# Altium PCB SJA1105Q_LAN8870_EVB_revA.PcbDoc (part 2 of 5)
Units mm, origin at the board's own origin, x right, y up, seen from the top; angles counter-clockwise.
Board outline 128 x 110 mm, 6 copper layers (Top Layer, Mid Layer 1, Mid Layer 2, Mid Layer 3, Mid Layer 4, Bottom Layer), stack 1.538 mm thick; 490 components, 327 nets, 1659 pads, 519 vias.
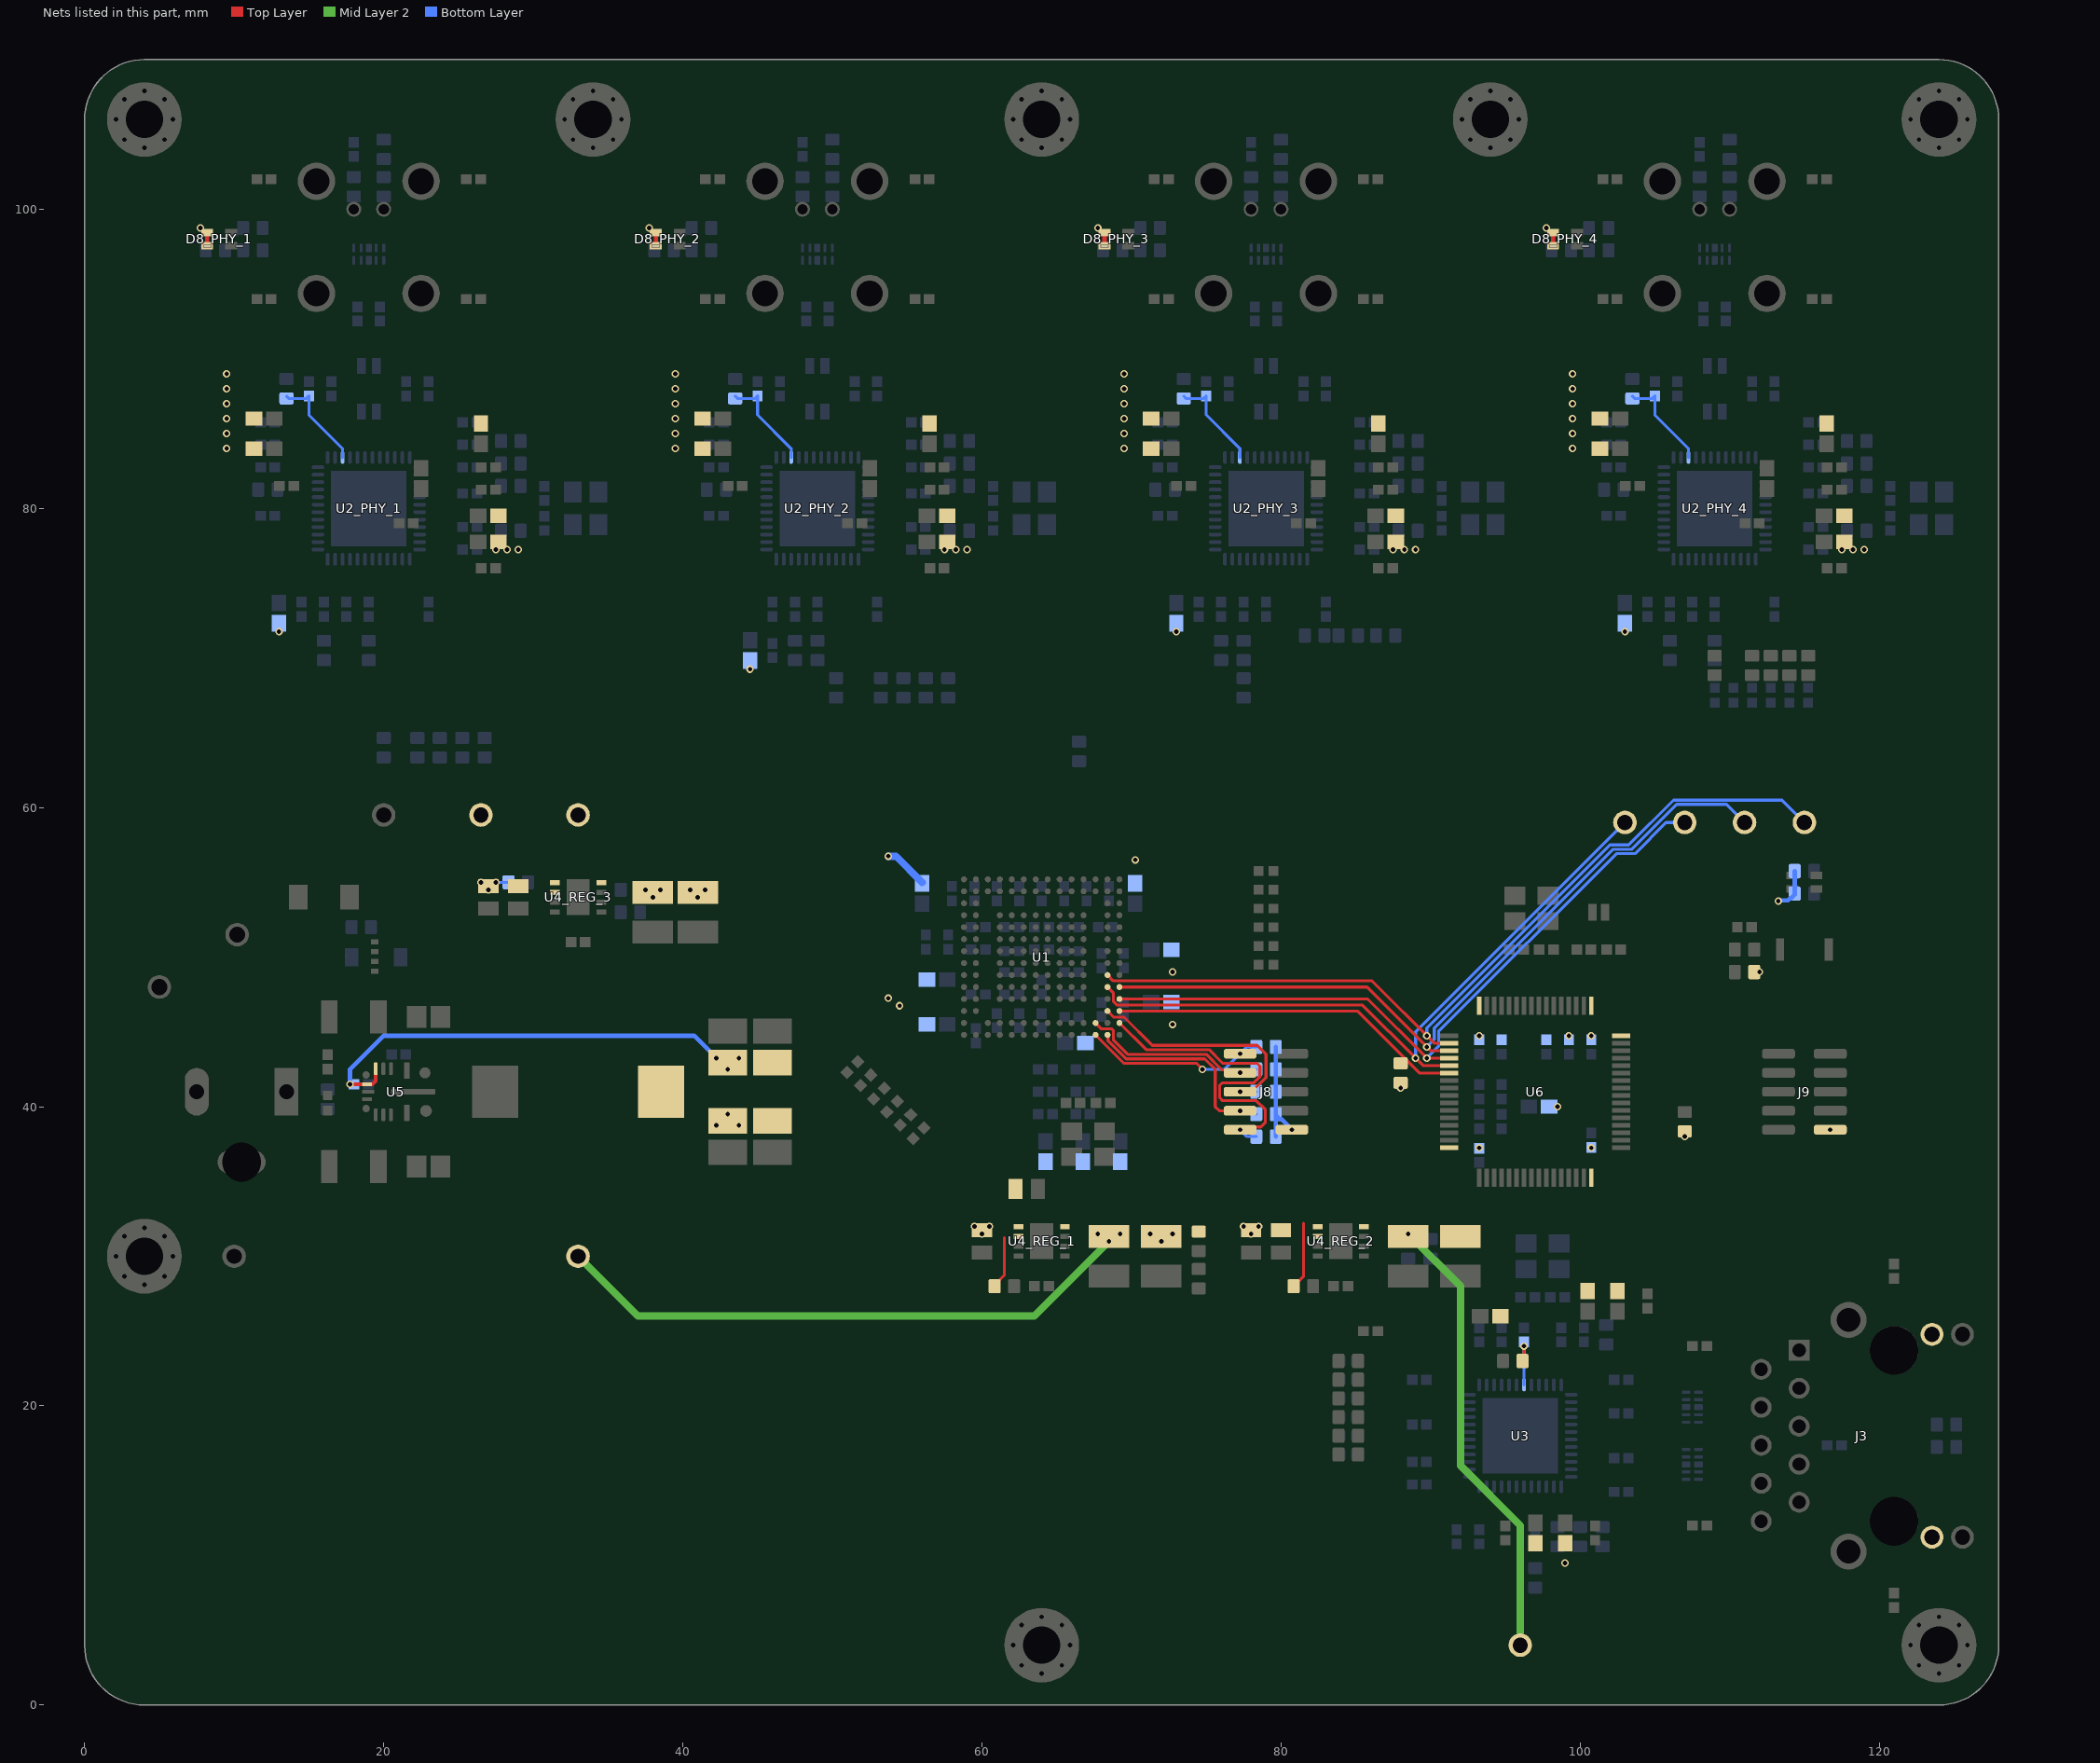
[diagram p6: the nets of this part, all layers, seen from the top]

## Components (designator, comment, footprint, x,y, rotation, side; value= is the part's Value field where it differs from the comment) (continued)
R24_PHY_3 "10k" R0603B 77.5,70.5 r270 bottom value=100k (schematic designator R24)
R24_PHY_4 "10k" R0603B 109,70.5 r270 bottom value=100k (schematic designator R24)
R25_PHY_1 "1k" R0603B 8.75,97.25 r180 bottom value=100k (schematic designator R25)
R25_PHY_2 "1k" R0603B 38.75,97.25 r180 bottom value=100k (schematic designator R25)
R25_PHY_3 "1k" R0603B 68.75,97.25 r180 bottom value=100k (schematic designator R25)
R25_PHY_4 "1k" R0603B 98.75,97.25 r180 bottom value=100k (schematic designator R25)
R26_PHY_1 "1k" R0603B 22.25,64 r90 bottom value=100k (schematic designator R26)
R26_PHY_2 "1k" R0603B 53.25,68 r90 bottom value=100k (schematic designator R26)
R26_PHY_3 "1k" R0603B 66.5,63.75 r90 bottom value=100k (schematic designator R26)
R26_PHY_4 "1k" R0603B 111.5,69.5 r270 top value=100k (schematic designator R26)
R27_PHY_1 "4.7k" R0603B 28.5,83 r0 bottom value=100k (schematic designator R27)
R27_PHY_2 "4.7k" R0603B 58.5,83 r0 bottom value=100k (schematic designator R27)
R27_PHY_3 "4.7k" R0603B 88.5,83 r0 bottom value=100k (schematic designator R27)
R27_PHY_4 "4.7k" R0603B 118.5,83 r0 bottom value=100k (schematic designator R27)
R28_PHY_1 "12.1k" R0603B 28.5,84.5 r0 bottom value=100k (schematic designator R28)
R28_PHY_2 "12.1k" R0603B 58.5,84.5 r0 bottom value=100k (schematic designator R28)
R28_PHY_3 "12.1k" R0603B 88.5,84.5 r0 bottom value=100k (schematic designator R28)
R28_PHY_4 "12.1k" R0603B 118.5,84.5 r0 bottom value=100k (schematic designator R28)
R29_PHY_1 "200" R0603B 16,70.5 r270 bottom value=100k (schematic designator R29)
R29_PHY_2 "200" R0603B 47.5,70.5 r90 bottom value=100k (schematic designator R29)
R29_PHY_3 "200" R0603B 76,70.5 r270 bottom value=100k (schematic designator R29)
R29_PHY_4 "200" R0603B 106,70.5 r270 bottom value=100k (schematic designator R29)
R30 "100k" R0603B 95.5,23 r0 top
R31 "4.7k" R0603B 101.5,11.25 r90 bottom
R32 "4.7k" R0603B 98.5,11.25 r90 bottom
R33 "4.7k" R0603B 84.5,23 r0 top
R34 "1k" R0603B 84.5,20.5 r0 top
R35 "1k" R0603B 84.5,19.25 r0 top
R36 "1k" R0603B 84.5,18 r0 top
R37 "1k" R0603B 84.5,16.75 r0 top
R38 "0402 JUMPER" RESC1005X40X25ML05T05 51.348,42.652 r45 top
R39 "1k" R0603B 97,8.5 r270 bottom
R40 "0402 JUMPER" RESC1005X40X25ML05T05 52.232,41.768 r45 top
R41 "1k" R0603B 100,11.25 r90 bottom
R42 "1k" R0603B 84.5,21.75 r0 top
R43 "6.04k" R0603B 101.75,24.75 r90 bottom
R44_REG_1 "VARIES" R0603B 74.5,31 r90 top (schematic designator R44)
R44_REG_2 "VARIES" R0603B 88.5,30.5 r90 bottom (schematic designator R44)
R44_REG_3 "VARIES" R0603B 36.5,54.5 r0 bottom (schematic designator R44)
R45_REG_1 "100k" R0603B 61.5,28 r0 top (schematic designator R45)
R45_REG_2 "100k" R0603B 81.5,28 r0 top (schematic designator R45)
R45_REG_3 "100k" R0603B 29,55 r0 bottom (schematic designator R45)
R46_REG_1 "100k" R0603B 74.5,28.5 r90 top value=10k (schematic designator R46)
R46_REG_2 "100k" R0603B 90,30.5 r270 bottom value=10k (schematic designator R46)
R46_REG_3 "100k" R0603B 36.5,53 r180 bottom value=10k (schematic designator R46)
R47 "DNP" R0603B 16.25,40.5 r90 bottom
R48 "0402 JUMPER" RESC1005X40X25ML05T05 16.25,40.25 r270 top
R50 "1k" R0603B 115,54.25 r180 bottom
R51 "1k" R0603B 115,55.75 r180 bottom
R52 "10k" R0603B 107,39 r270 top
R53 "330" R0603B 111,50.5 r0 top
R54 "10k" R0603B 111,49 r180 top
R55 "0402 JUMPER" RESC1005X40X25ML05T05 53.116,40.884 r45 top
R56 "0402 JUMPER" RESC1005X40X25ML05T05 54,40 r45 top
R57 "0402 JUMPER" RESC1005X40X25ML05T05 55.768,38.232 r45 top
R58 "0402 JUMPER" RESC1005X40X25ML05T05 54.884,39.116 r45 top
R59 "0402 JUMPER" RESC1005X40X25ML05T05 84.5,20.5 r180 bottom
R60 "0402 JUMPER" RESC1005X40X25ML05T05 84.5,19.25 r180 bottom
R61 "0402 JUMPER" RESC1005X40X25ML05T05 84.5,18 r180 bottom
R62 "0402 JUMPER" RESC1005X40X25ML05T05 84.5,16.75 r180 bottom
R63 "0402 JUMPER" RESC1005X40X25ML05T05 84.5,23 r180 bottom
R64 "0402 JUMPER" RESC1005X40X25ML05T05 84.5,21.75 r180 bottom
R65 "0402 JUMPER" RESC1005X40X25ML05T05 79,49.5 r0 top
R66 "0402 JUMPER" RESC1005X40X25ML05T05 79,50.75 r0 top
R67 "0402 JUMPER" RESC1005X40X25ML05T05 79,52 r0 top
R68 "0402 JUMPER" RESC1005X40X25ML05T05 79,53.25 r0 top
R69 "0402 JUMPER" RESC1005X40X25ML05T05 79,55.75 r0 top
R70 "0402 JUMPER" RESC1005X40X25ML05T05 79,54.5 r0 top
R71 "0402 JUMPER" RESC1005X40X25ML05T05 115.25,67.5 r90 bottom
R72 "0402 JUMPER" RESC1005X40X25ML05T05 114,67.5 r90 bottom
R73 "0402 JUMPER" RESC1005X40X25ML05T05 112.75,67.5 r90 bottom
R74 "0402 JUMPER" RESC1005X40X25ML05T05 111.5,67.5 r90 bottom
R75 "0402 JUMPER" RESC1005X40X25ML05T05 110.25,67.5 r90 bottom
R76 "0402 JUMPER" RESC1005X40X25ML05T05 109,67.5 r90 bottom
SW1 "KXT331LHS" FP-KXT331LHS-MFG 115,50.5 r0 top
U1 "SJA1105QELY" SJA1105QELY-Footprint-1 64,50 r90 top
U2_PHY_1 "LAN8870T-I/PUA" QFN50P700X700X100_HS-49N 19,80 r180 bottom (schematic designator U2)
U2_PHY_2 "LAN8870T-I/PUA" QFN50P700X700X100_HS-49N 49,80 r180 bottom (schematic designator U2)
U2_PHY_3 "LAN8870T-I/PUA" QFN50P700X700X100_HS-49N 79,80 r180 bottom (schematic designator U2)
U2_PHY_4 "LAN8870T-I/PUA" QFN50P700X700X100_HS-49N 109,80 r180 bottom (schematic designator U2)
U3 "LAN8830-V/PSA" QFN50P700X700X100_HS-49N 96,18 r180 bottom
U4_REG_1 "MCP1726T-ADJE/MF" DFN-MF8 64,31 r0 top (schematic designator U4)
U4_REG_2 "MCP1726T-ADJE/MF" DFN-MF8 84,31 r0 top (schematic designator U4)
U4_REG_3 "MCP1726T-ADJE/MF" DFN-MF8 33,54 r0 top (schematic designator U4)
U5 "LM61495Q3RPHRQ1" FP-RPH0016A-MFG 21,41 r270 top
U6 "STM32G473RET6TR" STM32G473RET6TR-Footprint-1 97,41 r270 top
Y1 "ABM8G-25.000MHZ-18-D2Y-T" FP-ABM8G-MFG 67.1,37.5 r180 top
Y2_PHY_1 "ABM8G-25.000MHZ-18-D2Y-T" FP-ABM8G-MFG 33.5,80 r270 bottom (schematic designator Y2)
Y2_PHY_2 "ABM8G-25.000MHZ-18-D2Y-T" FP-ABM8G-MFG 63.5,80 r270 bottom (schematic designator Y2)
Y2_PHY_3 "ABM8G-25.000MHZ-18-D2Y-T" FP-ABM8G-MFG 93.5,80 r270 bottom (schematic designator Y2)
Y2_PHY_4 "ABM8G-25.000MHZ-18-D2Y-T" FP-ABM8G-MFG 123.5,80 r270 bottom (schematic designator Y2)
Y3 "ABM8G-25.000MHZ-18-D2Y-T" FP-ABM8G-MFG 97.5,30 r180 bottom
Y4 "ABM8G-25.000MHZ-18-D2Y-T" FP-ABM8G-MFG 96.75,53.25 r180 top
Y5 "ECS-.327-12.5-1210-TR" FP-ECX-1210-MFG 101.25,53 r180 top

## Footprints (in the part's own frame and the unit in brackets; to place one, negate y for a bottom-side part, rotate by r counter-clockwise, add the part's x,y. Pads: shape width x height; smd on the part's side, far side on the other; paste and mask are expansions set on the pad)
1-2834011-2-Footprint-1 [mil]
  round 62 / inner round 60 / far side round 62 hole 42 paste-99999 mask+0: 1(0,0) 2(137.8,-204.72)
  silkscreen extent -243,-402 206,92, body extent -132,-386 202,86, height 499
3220-10-0300-00-Footprint-1 [mm]
  rrect50% 2.2x0.65 smd: 1(-1.73,2.54) 2(1.73,2.54) 3(-1.73,1.27) 4(1.73,1.27) 5(-1.73,0) 6(1.73,0) 7(-1.73,-1.27) 8(1.73,-1.27) 9(-1.73,-2.54) 10(1.73,-2.54)
  silkscreen extent -2.5,-6.35 2.5,6.35, body extent -2.74,-6.39 2.76,6.31, height 5.22
DFN-MF8 [mm] "SON, 8-Leads, Body 3x3mm, Pitch 0.65mm, Microchip Recommended"
  rect 0.65x0.35 smd: 1(-1.55,0.975) 2(-1.55,0.325) 3(-1.55,-0.325) 4(-1.55,-0.975) 5(1.55,-0.975) 6(1.55,-0.325) 7(1.55,0.325) 8(1.55,0.975)
  rect 1.55x2.4 smd: 9(0,0)
  silkscreen extent -2.47,-1.7 1.7,1.82, body extent -1.55,-1.55 1.55,1.55, height 1
E6S20A-40MT5-Z-Footprint-1 [mm]
  round 1 hole 0.7: 1(-1,0) 2(1,0)
  round 2.5 hole 1.74: 3(-3.5,-5.63) 3(-3.5,1.87) 3(3.5,-5.63) 3(3.5,1.87)
  round 0.025 smd: 3(-3.475,-0.8) 3(0,2.6) 3(3.475,-0.8)
  Top Layer region: -1.1,2.1 1.1,2.1 1.1,3.1 -1.1,3.1
  Top Layer region: -2.3,-1.805 -4.65,-1.805 -4.655,-1.8 -4.655,0.2 -4.647,0.204 -2.99,0.204 -2.985,0.198 -2.992,0.099 -2.995,0 -2.995,0 -2.814,-0.829 -2.305,-1.508 -2.305,-1.508 -2.295,-1.532
  Top Layer region: 2.3,-1.805 4.65,-1.805 4.655,-1.8 4.655,0.2 4.647,0.204 2.99,0.204 2.985,0.198 2.992,0.099 2.995,0 2.995,0 2.814,-0.829 2.305,-1.508 2.305,-1.508 2.295,-1.532
  body extent -5.5,-7.04 5.5,14.86, height 12.8
FP-0402-L_1_0_0_05-W_0_5-IPC_A [mm]
  rect 0.715x0.672 smd paste+0 mask+0: 1(-0.479,0) 2(0.479,0)
  silkscreen extent -0.84,-0.74 0.84,0.74, body extent -0.5,-0.25 0.5,0.25, height 0.55
FP-0805-L_2_01_0_2-W_1_25-IPC_B [mm]
  rect 1.305x1.456 smd paste+0 mask+0: 1(-0.806,0) 2(0.806,0)
  silkscreen extent -1.46,-1.13 1.46,1.13, body extent -1.71,-0.98 1.71,0.98, height 0.25
FP-1210-L_3_2_0_3-W_2_5_0-IPC_B [mm]
  rect 1.553x2.706 smd paste+0 mask+0: 1(-1.325,0) 2(1.325,0)
  silkscreen extent -0.25,-1.35 0.25,1.35, body extent -1.6,-1.25 1.6,1.25, height 2.1
FP-5001-MFG [mm]
  round 1.57 hole 1.016 paste-2539.97 mask+0: 1(0,0)
  silkscreen extent -1.35,-1.34 1.35,1.34, body extent -1.45,-1.45 1.45,1.45, height 0.25
FP-ABM8G-MFG [mm]
  rect 1.4x1.2 smd paste+0 mask+0: 1(-1.1,-0.85) 2(1.1,-0.85) 3(1.1,0.85) 4(-1.1,0.85)
  silkscreen extent -2.48,-1.83 1.6,1.83, body extent -1.9,-1.55 1.9,1.55, height 0.25
FP-ACT1210G-800-2P-TL10-MFG [mm]
  rect 1.05x0.6 smd paste+0 mask+0: 1(-1.525,0.5) 2(-1.525,-0.5) 3(1.525,-0.5) 4(1.525,0.5)
  silkscreen extent -2.72,-1.35 1.7,1.35, body extent -1.95,-1.25 1.95,1.25, height 2.5
FP-BLM18-0_15-t0_8-IPC_B [mm]
  rect 1.106x0.958 smd paste+0 mask+0: 1(-0.676,0) 2(0.676,0)
  silkscreen extent -1.23,-0.88 1.23,0.88, body extent -0.8,-0.4 0.8,0.4, height 0.95
FP-C0805C475J4RACAUTO-MFG [mm]
  rect 0.95x1.35 smd paste+0 mask+0: 1(-0.75,0) 2(0.75,0)
  silkscreen extent -1.15,-1.05 1.15,1.05, body extent -1,-0.63 1,0.63, height 1.4
FP-C3225-250-0_4-MFG [mm]
  rect 1.1x2.2 smd paste+0 mask+0: 1(-1.65,0) 2(1.65,0)
  silkscreen extent -0.72,-1.4 0.72,1.4, body extent -2.3,-1.5 2.3,1.5, height 0.25
FP-DQA0010A-MFG [mm]
  rrect50% 0.565x0.2 smd paste+0 mask+0: 1(-0.417,1) 2(-0.417,0.5) 4(-0.417,-0.5) 5(-0.417,-1) 6(0.417,-1) 7(0.417,-0.5) 9(0.417,0.5) 10(0.417,1)
  rrect25% 0.565x0.4 smd paste-1000 mask+0: 3(-0.417,0) 8(0.417,0)
  silkscreen extent -1.38,-1.48 0.55,1.48, body extent -0.5,-1.25 0.5,1.25, height 0.55
FP-ECX-1210-MFG [mm]
  rect 0.575x1.14 smd paste+0 mask+0: 1(-0.413,0) 2(0.413,0)
  silkscreen extent -0.65,-0.95 0.65,0.95, body extent -0.8,-0.67 0.8,0.67, height 0.25
FP-GRM32E-0_3-0_2-IPC_C [mm]
  rect 1.703x2.606 smd paste+0 mask+0: 1(-1.051,0) 2(1.051,0)
  silkscreen extent -1.9,-1.75 1.9,1.75, body extent -2,-1.45 2,1.45, height 0.25
FP-KXT331LHS-MFG [mm]
  rect 0.55x1.5 smd paste+0 mask+0: 1(-1.625,0) 2(1.625,0)
  silkscreen extent -1.65,-1.15 1.65,1.15, body extent -2,-1.25 2,1.25, height 0.25
FP-PJ-102A-MFG [mm]
  rect 3.2x1.6 hole 1 slot 2.6 at 0 deg paste-2539.97 mask+0: 1(0,-6.5)
  rrect100% 3.2x1.6 hole 1 slot 2.6 at 0 deg paste-2539.97 mask+0: 2(0,-0.5)
  rrect100% 1.6x3.2 hole 2.6 slot 1 at 0 deg paste-2539.97 mask+0: 3(-4.7,-3.5)
  silkscreen extent -4.6,-8.08 4.6,7.3, body extent -5.6,-7.4 4.7,7.4, height 0.25
FP-RPH0016A-MFG [mm]
  round 0.743 smd paste-1000 mask+0: 1(-1.262,1.763)
  rrect25% 1.075x0.4 smd paste+0 mask+0: 2(-1.413,0.55) 14(1.413,0.55)
  rrect40% 0.825x0.25 smd paste+0 mask+0: 3(-1.538,-0.525) 4(-1.538,-1.025) 5(-1.538,-1.525) 11(1.538,-1.525) 12(1.538,-1.025) 13(1.538,-0.525)
  round 0.495 smd paste-1000 mask+0: 6(-1.125,-2.175) 10(1.125,-2.175)
  rrect40% 0.25x0.675 smd paste+0 mask+0: 7(-0.5,-2.113) 9(0.5,-2.113)
  rrect40% 0.25x0.825 smd paste+0 mask+0: 8(0,-2.038)
  round 0.787 smd paste-1000 mask+0: 15(1.281,1.831)
  rrect29% 0.35x2.975 smd paste+0 mask+0: 16(0,0.963)
  Top Layer region: 1.9,1.35 1.925,1.357 1.943,1.375 1.95,1.4 1.95,1.4 1.95,2.05 1.943,2.075 1.925,2.093 1.9,2.1 1.9,2.1 1.65,2.1 1.631,2.104 1.615,2.115 1.604,2.131 1.6,2.15 1.6,2.15 1.6,2.4 1.593,2.425 1.575,2.443 1.55,2.45 1.55,2.45 0.85,2.45 0.825,2.443 0.807,2.425 0.8,2.4 0.8,2.4 0.8,1.4 0.807,1.375 0.825,1.357 0.85,1.35 0.85,1.35 0.85,1.35
  Top Layer region: -1.9,1.35 -1.925,1.357 -1.943,1.375 -1.95,1.4 -1.95,1.4 -1.95,2.05 -1.943,2.075 -1.925,2.093 -1.9,2.1 -1.9,2.1 -1.65,2.1 -1.631,2.104 -1.615,2.115 -1.604,2.131 -1.6,2.15 -1.6,2.15 -1.6,2.4 -1.593,2.425 -1.575,2.443 -1.55,2.45 -1.55,2.45 -0.85,2.45 -0.825,2.443 -0.807,2.425 -0.8,2.4 -0.8,2.4 -0.8,1.4 -0.807,1.375 -0.825,1.357 -0.85,1.35 -0.85,1.35 -0.85,1.35
  Top Layer region: 1.55,-2.45 1.575,-2.443 1.593,-2.425 1.6,-2.4 1.6,-2.4 1.6,-2.15 1.604,-2.131 1.615,-2.115 1.631,-2.104 1.65,-2.1 1.65,-2.1 1.9,-2.1 1.925,-2.093 1.943,-2.075 1.95,-2.05 1.95,-2.05 1.95,-1.95 1.943,-1.925 1.925,-1.907 1.9,-1.9 1.9,-1.9 0.9,-1.9 0.875,-1.907 0.857,-1.925 0.85,-1.95 0.85,-1.95 0.85,-2.4 0.857,-2.425 0.875,-2.443 0.9,-2.45 0.9,-2.45 0.9,-2.45
  Top Layer region: -1.55,-2.45 -1.575,-2.443 -1.593,-2.425 -1.6,-2.4 -1.6,-2.4 -1.6,-2.15 -1.604,-2.131 -1.615,-2.115 -1.631,-2.104 -1.65,-2.1 -1.65,-2.1 -1.9,-2.1 -1.925,-2.093 -1.943,-2.075 -1.95,-2.05 -1.95,-2.05 -1.95,-1.95 -1.943,-1.925 -1.925,-1.907 -1.9,-1.9 -1.9,-1.9 -0.9,-1.9 -0.875,-1.907 -0.857,-1.925 -0.85,-1.95 -0.85,-1.95 -0.85,-2.4 -0.857,-2.425 -0.875,-2.443 -0.9,-2.45 -0.9,-2.45 -0.9,-2.45
  silkscreen extent -2.67,-2.88 1.8,2.88, body extent -2.05,-2.55 2.05,2.55, height 0.25
FP-SF-1206FP-MFG [mm]
  rect 1.25x1.65 smd paste+0 mask+0: 1(-1.725,0) 2(1.725,0)
  silkscreen extent -0.72,-0.82 0.72,0.82, body extent -2.45,-0.92 2.45,0.92, height 0.25
ONSC-SOD-123-2-425-04_V [mm] "SOD, 2-Leads, Body 2.69x1.6mm"
  rect 0.91x1.22 smd: 1(-1.635,0) 2(1.635,0)
  silkscreen extent -1.76,-0.8 0.78,1.28, body extent -1.35,-0.8 1.35,0.8, height 1.35
"PTHV6 M2" [mm]
  round 5 hole 2.5: 1(0,0)
  round 0.5 hole 0.3: 2(0,1.9) 3(1.344,1.344) 4(1.9,0) 5(1.344,-1.344) 6(0,-1.9) 7(-1.9,0) 7(-1.344,-1.344) 7(-1.344,1.344)
QFN50P700X700X100_HS-49N [mm] "QFN, 48-Leads, Body 7.00x7.00mm, Pitch 0.50mm, Thermal Pad 5.05x5.05mm, IPC Medium Density"
  oval 0.85x0.25 smd: 1(-3.4,2.75) 2(-3.4,2.25) 3(-3.4,1.75) 4(-3.4,1.25) 5(-3.4,0.75) 6(-3.4,0.25) 7(-3.4,-0.25) 8(-3.4,-0.75) 9(-3.4,-1.25) 10(-3.4,-1.75) 11(-3.4,-2.25) 12(-3.4,-2.75) 25(3.4,-2.75) 26(3.4,-2.25) 27(3.4,-1.75) 28(3.4,-1.25) 29(3.4,-0.75) 30(3.4,-0.25) 31(3.4,0.25) 32(3.4,0.75) 33(3.4,1.25) 34(3.4,1.75) 35(3.4,2.25) 36(3.4,2.75)
  oval 0.25x0.85 smd: 13(-2.75,-3.4) 14(-2.25,-3.4) 15(-1.75,-3.4) 16(-1.25,-3.4) 17(-0.75,-3.4) 18(-0.25,-3.4) 19(0.25,-3.4) 20(0.75,-3.4) 21(1.25,-3.4) 22(1.75,-3.4) 23(2.25,-3.4) 24(2.75,-3.4) 37(2.75,3.4) 38(2.25,3.4) 39(1.75,3.4) 40(1.25,3.4) 41(0.75,3.4) 42(0.25,3.4) 43(-0.25,3.4) 44(-0.75,3.4) 45(-1.25,3.4) 46(-1.75,3.4) 47(-2.25,3.4) 48(-2.75,3.4)
  rect 5.05x5.05 smd: 49(0,0)
  silkscreen extent -4.43,-3.65 3.65,3.65, body extent -3.5,-3.5 3.5,3.5, height 1
R0603B [mm] "Chip Resistor, 0603, 2-Leads, Body 1.58x0.85mm, IPC Medium Density"
  rrect25% 0.8x0.95 smd: 1(-0.65,0) 2(0.65,0)
  silkscreen extent -0.2,-0.7 0.2,0.7, body extent -0.82,-0.48 0.82,0.48, height 0.5
RESC1005X40X25ML05T05 [mm] "Chip Resistor, 2-Leads, Body 1.00x0.50mm, IPC Low Density"
  rect 0.65x0.65 smd: 1(-0.5,0) 2(0.5,0)
  body extent -0.53,-0.28 0.53,0.28, height 0.4
RJMG201K21120FR-Footprint-1 [mm]
  round 1.53 hole 1.02: L1(-6.785,-4.57) L2(-6.785,-2.54) L3(6.785,-4.57) L4(6.785,-2.54)
  rect 1.398x1.398 / inner round 1.398 / far side rect 1.398x1.398 hole 0.89: P1(5.715,6.35)
  round 1.398 hole 0.89: P2(4.445,8.89) P3(3.175,6.35) P4(1.905,8.89) P5(0.635,6.35) P6(-0.635,8.89) P7(-1.905,6.35) P8(-3.175,8.89) P9(-4.445,6.35) P10(-5.715,8.89)
  round 2.4 hole 1.6: S1(-7.745,3.05) S2(7.745,3.05)
  round 3.25 hole 3.25 unplated: ""(-5.715,0) ""(5.715,0)
  silkscreen extent -7.88,-10.84 8.63,10.81, body extent -8.87,-10.84 8.87,10.81, height 14.8
SISH615ADN-T1-GE3-Footprint-1 [mm]
  rect 0.35x0.5 smd paste+0 mask+0: 1(-0.937,-1.4) 2(-0.288,-1.4) 3(0.363,-1.4) 4(1.012,-1.4)
  round 0.025 smd mask+0: 5-6-7-8(0.038,0.51)
  Top Layer region: -1.187,-0.63 -1.187,-0.215 -1.568,-0.215 -1.568,0.215 -1.187,0.215 -1.187,1.35 -1.137,1.35 -1.137,1.65 -0.737,1.65 -0.737,1.35 -0.487,1.35 -0.487,1.65 -0.088,1.65 -0.088,1.35 0.163,1.35 0.163,1.65 0.563,1.65 0.563,1.35 0.813,1.35 0.813,1.65 1.212,1.65 1.212,1.35 1.262,1.35 1.262,0.215 1.643,0.215 1.643,-0.215 1.262,-0.215 1.262,-0.63
  silkscreen extent -1.51,-2.38 1.59,-1.01, body extent -1.67,-1.75 1.74,1.75, height 0.25
SJA1105QELY-Footprint-1 [mm]
  round 0.4 smd: A1(-5.2,5.2) A2(-4.4,5.2) A3(-3.6,5.2) A4(-2.8,5.2) A5(-2,5.2) A6(-1.2,5.2) A7(-0.4,5.2) A8(0.4,5.2) A9(1.2,5.2) A10(2,5.2) A11(2.8,5.2) A12(3.6,5.2) A13(4.4,5.2) A14(5.2,5.2) B1(-5.2,4.4) B3(-3.6,4.4) B4(-2.8,4.4) B5(-2,4.4) B6(-1.2,4.4) B7(-0.4,4.4) B8(0.4,4.4) B9(1.2,4.4) B10(2,4.4) B11(2.8,4.4) B12(3.6,4.4) B13(4.4,4.4) B14(5.2,4.4) C1(-5.2,3.6) C2(-4.4,3.6) C13(4.4,3.6) C14(5.2,3.6) D1(-5.2,2.8) D2(-4.4,2.8) D4(-2.8,2.8) D5(-2,2.8) D6(-1.2,2.8) D7(-0.4,2.8) D8(0.4,2.8) D9(1.2,2.8) D10(2,2.8) D11(2.8,2.8) D13(4.4,2.8) D14(5.2,2.8) E1(-5.2,2) E2(-4.4,2) E4(-2.8,2) E5(-2,2) E6(-1.2,2) E7(-0.4,2) E8(0.4,2) E9(1.2,2) E10(2,2) E11(2.8,2) E13(4.4,2) E14(5.2,2) F1(-5.2,1.2) F2(-4.4,1.2) F4(-2.8,1.2) F5(-2,1.2) F6(-1.2,1.2) F7(-0.4,1.2) F8(0.4,1.2) F9(1.2,1.2) F10(2,1.2) F11(2.8,1.2) F13(4.4,1.2) F14(5.2,1.2) G1(-5.2,0.4) G2(-4.4,0.4) G4(-2.8,0.4) G5(-2,0.4) G6(-1.2,0.4) G7(-0.4,0.4) G8(0.4,0.4) G9(1.2,0.4) G10(2,0.4) G11(2.8,0.4) G13(4.4,0.4) G14(5.2,0.4) H1(-5.2,-0.4) H2(-4.4,-0.4) H4(-2.8,-0.4) H5(-2,-0.4) H6(-1.2,-0.4) H7(-0.4,-0.4) H8(0.4,-0.4) H9(1.2,-0.4) H10(2,-0.4) H11(2.8,-0.4) H13(4.4,-0.4) H14(5.2,-0.4) J1(-5.2,-1.2) J2(-4.4,-1.2) J4(-2.8,-1.2) J5(-2,-1.2) J6(-1.2,-1.2) J7(-0.4,-1.2) J8(0.4,-1.2) J9(1.2,-1.2) J10(2,-1.2) J11(2.8,-1.2) J13(4.4,-1.2) J14(5.2,-1.2) K1(-5.2,-2) K2(-4.4,-2) K4(-2.8,-2) K5(-2,-2) K6(-1.2,-2) K7(-0.4,-2) K8(0.4,-2) K9(1.2,-2) K10(2,-2) K11(2.8,-2) K13(4.4,-2) K14(5.2,-2) L1(-5.2,-2.8) L2(-4.4,-2.8) L4(-2.8,-2.8) L5(-2,-2.8) L6(-1.2,-2.8) L7(-0.4,-2.8) L8(0.4,-2.8) L9(1.2,-2.8) L10(2,-2.8) L11(2.8,-2.8) L13(4.4,-2.8) L14(5.2,-2.8) M1(-5.2,-3.6) M2(-4.4,-3.6) M13(4.4,-3.6) M14(5.2,-3.6) N1(-5.2,-4.4) N2(-4.4,-4.4) N3(-3.6,-4.4) N4(-2.8,-4.4) N5(-2,-4.4) N6(-1.2,-4.4) N7(-0.4,-4.4) N8(0.4,-4.4) N9(1.2,-4.4) N10(2,-4.4) N11(2.8,-4.4) N12(3.6,-4.4) N13(4.4,-4.4) N14(5.2,-4.4) P1(-5.2,-5.2) P2(-4.4,-5.2) P3(-3.6,-5.2) P4(-2.8,-5.2) P5(-2,-5.2) P6(-1.2,-5.2) P7(-0.4,-5.2) P8(0.4,-5.2) P9(1.2,-5.2) P10(2,-5.2) P11(2.8,-5.2) P12(3.6,-5.2) P13(4.4,-5.2) P14(5.2,-5.2)
  silkscreen extent -6.1,-6 6,6.1, body extent -6,-6 6,6, height 1.5
STM32G473RET6TR-Footprint-1 [mm]
  rect 1.194x0.305 smd paste+0 mask+0: 1(-5.75,3.75) 2(-5.75,3.25) 3(-5.75,2.75) 4(-5.75,2.25) 5(-5.75,1.75) 6(-5.75,1.25) 7(-5.75,0.75) 8(-5.75,0.25) 9(-5.75,-0.25) 10(-5.75,-0.75) 11(-5.75,-1.25) 12(-5.75,-1.75) 13(-5.75,-2.25) 14(-5.75,-2.75) 15(-5.75,-3.25) 16(-5.75,-3.75) 33(5.75,-3.75) 34(5.75,-3.25) 35(5.75,-2.75) 36(5.75,-2.25) 37(5.75,-1.75) 38(5.75,-1.25) 39(5.75,-0.75) 40(5.75,-0.25) 41(5.75,0.25) 42(5.75,0.75) 43(5.75,1.25) 44(5.75,1.75) 45(5.75,2.25) 46(5.75,2.75) 47(5.75,3.25) 48(5.75,3.75)
  rect 0.305x1.194 smd paste+0 mask+0: 17(-3.75,-5.75) 18(-3.25,-5.75) 19(-2.75,-5.75) 20(-2.25,-5.75) 21(-1.75,-5.75) 22(-1.25,-5.75) 23(-0.75,-5.75) 24(-0.25,-5.75) 25(0.25,-5.75) 26(0.75,-5.75) 27(1.25,-5.75) 28(1.75,-5.75) 29(2.25,-5.75) 30(2.75,-5.75) 31(3.25,-5.75) 32(3.75,-5.75) 49(3.75,5.75) 50(3.25,5.75) 51(2.75,5.75) 52(2.25,5.75) 53(1.75,5.75) 54(1.25,5.75) 55(0.75,5.75) 56(0.25,5.75) 57(-0.25,5.75) 58(-0.75,5.75) 59(-1.25,5.75) 60(-1.75,5.75) 61(-2.25,5.75) 62(-2.75,5.75) 63(-3.25,5.75) 64(-3.75,5.75)
  silkscreen extent -6.93,-6.85 6.85,6.85, body extent -6,-6 6,6, height 1.6
WE-LHMI_1335 [mm] "SMT Power Inductor, 2-Leads, body 12.6x12.6mm"
  rect 3.1x3.5 smd: 1(-5.55,0) 2(5.55,0)
  Top Layer keep-out region: -3.9,6.45 3.9,6.45 3.9,-6.45 -3.9,-6.45
  silkscreen extent -7.72,-6.45 6.45,6.45, body extent -6.75,-6.3 6.75,6.3, height 3.3
WL-SBCD_0606 [mm] "SMT Bi-color Chip LED Diffuesed, body 1.5x1.6mm"
  rect 0.5x0.8 smd: 1(-0.45,0.8) 2(-0.45,-0.8) 3(0.45,-0.8) 4(0.45,0.8)
  silkscreen extent -0.07,1.48 0.07,1.63, body extent -0.75,-0.8 0.75,0.8, height 0.55

## Part data
C1 C2 C3 C4 C5 C6 C7 C8 C9 C10 C11 C12 C13 C14 C15 C16 C17 C18 C19 C20 C21 C22 C23 C24 C25 C26 C27 C28 C29 C30 C31 C32 C33 C34 C35 C36 C37 C38 C39 C40 C41 C42 C43 C44 C45 C46 C47 C48 C49 C50 C51 C52 C53 C54 C55 C56 C57 C58 C59 C60 C61 C62 C63 C64_PHY_1 C64_PHY_2 C64_PHY_3 C64_PHY_4 C65_PHY_1 C65_PHY_2 C65_PHY_3 C65_PHY_4 C66_PHY_1 C66_PHY_2 C66_PHY_3 C66_PHY_4 C67_PHY_1 C67_PHY_2 C67_PHY_3 C67_PHY_4 C68_PHY_1 C68_PHY_2 C68_PHY_3 C68_PHY_4 C69_PHY_1 C69_PHY_2 C69_PHY_3 C69_PHY_4 C70_PHY_1 C70_PHY_2 C70_PHY_3 C70_PHY_4 C71_PHY_1 C71_PHY_2 C71_PHY_3 C71_PHY_4 C72_PHY_1 C72_PHY_2 C72_PHY_3 C72_PHY_4 C73_PHY_1 C73_PHY_2 C73_PHY_3 C73_PHY_4 C74_PHY_1 C74_PHY_2 C74_PHY_3 C74_PHY_4 C75_PHY_1 C75_PHY_2 C75_PHY_3 C75_PHY_4 C76_PHY_1 C76_PHY_2 C76_PHY_3 C76_PHY_4 C77_PHY_1 C77_PHY_2 C77_PHY_3 C77_PHY_4 C78_PHY_1 C78_PHY_2 C78_PHY_3 C78_PHY_4 C79_PHY_1 C79_PHY_2 C79_PHY_3 C79_PHY_4 C80_PHY_1 C80_PHY_2 C80_PHY_3 C80_PHY_4 C81_PHY_1 C81_PHY_2 C81_PHY_3 C81_PHY_4 C82_PHY_1 C82_PHY_2 C82_PHY_3 C82_PHY_4 C83_PHY_1 C83_PHY_2 C83_PHY_3 C83_PHY_4 C84_PHY_1 C84_PHY_2 C84_PHY_3 C84_PHY_4 C85_PHY_1 C85_PHY_2 C85_PHY_3 C85_PHY_4 C86_PHY_1 C86_PHY_2 C86_PHY_3 C86_PHY_4 C87_PHY_1 C87_PHY_2 C87_PHY_3 C87_PHY_4 C88_PHY_1 C88_PHY_2 C88_PHY_3 C88_PHY_4 C89_PHY_1 C89_PHY_2 C89_PHY_3 C89_PHY_4 C90_PHY_1 C90_PHY_2 C90_PHY_3 C90_PHY_4 C91_PHY_1 C91_PHY_2 C91_PHY_3 C91_PHY_4 C92_PHY_1 C92_PHY_2 C92_PHY_3 C92_PHY_4 C93 C94 C95 C96 C97 C98 C99 C100 C101 C102 C103 C104 C105 C106 C107 C108 C109 C110 C111 C112 C113 C114 C119_REG_1 C119_REG_2 C119_REG_3 C120 C129 C130 C131 C132 C133 C134 C135 C136 C137 C138 C139 C140 C141 C142 C143 C144 C145 C146: library part CMP-001-00058-1, "LARGE PADS, 0402 CAP, CHANGE COMMENT TO MATCH REAL P/N", Capacitor Type=Ceramic, Case/Package=0402, Max Operating Temperature=85°C, Min Operating Temperature=-55°C, Mounting Technology="Surface Mount", Pins=2, RoHS Compliant=Yes
C115_REG_1 C115_REG_2 C115_REG_3 C116_REG_1 C116_REG_2 C116_REG_3: library part CMP-00212-84766729-1, "C0805C475J4RACAUTO Cap Ceramic 4.7uF 16V X7R 5% Pad SMD 0805 125C Automotive T/R", Capacitance=4.7µF, Case/Package=0805, Dielectric=X7R, Dielectric Material=Ceramic, Max Operating Temperature=125°C, Min Operating Temperature=-55°C, Tolerance=5%, Voltage Rating=16V, Height=1.4mm, Material=Ceramic, NexarPartId=84766729, Packaging="Cut Tape", RoHS=Compliant, Voltage Rating (DC)=16V
C117_REG_1 C117_REG_2 C117_REG_3 C118_REG_1 C118_REG_2 C118_REG_3: library part CMP-14477-002774-2, "None", Capacitance=1uF, Case Code (Imperial)=1210, Case Code (Metric)=3225, Dielectric=X5R, Max Operating Temperature=125°C, Min Operating Temperature=-55°C, Package Quantity=1, Resistor Type=Ceramic, Tolerance=10%, Voltage=100V, Case/Package=1210, Construction=Flat, Depth=2.5mm, Halogen Free="Halogen Free", Height=1.9mm, Length=3.2mm, Mount="Surface Mount", Number of Pins=2, Packaging="Tape and Reel", Radiation Hardening=No, REACH SVHC="No SVHC", RoHS Compliant=Yes, Series=M, Termination=SMD/SMT, Thickness=0.083inch, Voltage Rating=100V, Voltage Rating (DC)=100V, Width=2.5mm
C121 C122 C123 C124: library part CMP-2000-06362-2, "CAP CER 47UF 16V X5R 1210", Capacitance=47uF, Case Code (Imperial)=1210, Case Code (Metric)=3225, Dielectric=X5R, Max Operating Temperature=85°C, Min Operating Temperature=-55°C, Package Quantity=1, Tolerance=10%, Voltage=16V, Case/Package=1210, Depth=2.5mm, Height=2.5mm, Lead Free="Lead Free", Length=3.2mm, Material=Ceramic, Mount="Surface Mount", Number of Pins=2, Packaging="Cut Tape", Radiation Hardening=No, REACH SVHC="No SVHC", RoHS Compliant=Yes, Termination=SMD/SMT, Thickness=0.106inch, Voltage Rating=16V, Voltage Rating (DC)=16V, Width=0.098inch
C125 C126: library part CMP-08246-002653-1, "Multilayer Ceramic Capacitors 10uF ±20% 50V X7R SMD 1210", Capacitance=10uF, Case Code (Imperial)=1210, Case Code (Metric)=3225, Dielectric=X7R, Dielectric Material=Ceramic, Max Operating Temperature=125°C, Min Operating Temperature=-55°C, Package Quantity=1000, Tolerance=20%, Voltage Rating=50V, Case/Package=1210, Height=2.5mm, Lead Free="Lead Free", Length=0.126inch, Mount="Surface Mount", Packaging="Tape and Reel", REACH SVHC="No SVHC", Series=C, Termination=SMD/SMT, Thickness=0.11inch, Voltage Rating (DC)=50V, Weight=0.000564oz, Width=0.098inch
C127 C128: library part CMP-04427-003155-1, "Automotive Ceramic Capacitor, 0805, 470nF, 5%, X7R, 15%, 50V", Capacitance=470nF, Case/Package=0805, Dielectric=X7R, Max Operating Temperature=125°C, Min Operating Temperature=-55°C, Package Quantity=2000, Tolerance=5%, Voltage Rating (DC)=50V, Construction=Flat, Depth=1.25mm, Length=2.01mm, Mount="Surface Mount", Packaging="Tape and Reel", Radiation Hardening=No, RoHS Compliant=Yes
D1: library part CMP-1060-00565-1, "Zener Voltage Regulator, 500 mW, 2-Pin SOD-123, Pb-Free, Tape and Reel", Manufacturer="On Semiconductor", ComponentLink1Description="Manufacturer URL", ComponentLink1URL=http://www.onsemi.com/, ComponentLink2Description=Datasheet, ComponentLink2URL=http://www.onsemi.com/pub_link/Collateral/MMSZ5221BT1-D.PDF, ComponentLink3Description="Package Specification", ComponentLink3URL=http://www.onsemi.com/pub_link/Collateral/425-04.PDF, DatasheetVersion="Rev. 12", Mounting Technology="Surface Mount", P Max (W)=0.5, PackageDescription="2-Pin SOD, Body 1.6 x 2.69 mm", PackageReference=SOD-123-2-425-04, PackageVersion="Rev. G, 10/2009", Packing="Tape and Reel", PartNumber=MMSZ5242BT1G, RoHS=Pb-Free, VZ Typ (V)=12
D2 D3 D4 D5 D6 D7: library part CMP-04989-000002-1, "4-CHANNEL LOW-CAPACITANCE SURGE", Ambient Temperature Range High=+125°C, Ambient Temperature Range Low=-40°C, Breakdown Voltage=5.5V, Capacitance=0.55pF, Clamping Voltage=11.5V, Manufacturer="Texas Instruments", Manufacturer Part Number=ESD204DQAR, Package=DQA0010A, Peak Pulse Current=5.5A, Peak Pulse Power=50W, Reverse Standoff Voltage=3.6V, Temperature="-40°C to +125°C", Automotive=No, Category=Diode, ComponentLink2Description=Datasheet, ComponentLink2URL=http://www.ti.com/lit/ds/symlink/esd204.pdf, Device Class L1="Circuit Protection", Device Class L2="TVS Diodes", Device Class L3=unset, Digikey Description="4-CHANNEL LOW-CAPACITANCE SURGE", Direction=Bidirectional, Height=0.55mm, Lead Free=Yes, Mouser Description="4-Channel Low-Capacitance Surge and ESD Protection Diode 10-USON -40 to 125", Number Of Channels=4, Octopart=https://octopart.com/esd204dqar-texas+instruments-89917476, RoHS=TRUE, Standoff Height=0mm, Temperature Range High=+125°C, Temperature Range Low=-40°C
D8_PHY_1 D8_PHY_2 D8_PHY_3 D8_PHY_4 D10: library part CMP-004-00040-2, "Led, Red/Grn, 180Mcd/230Mcd, 624Nm/525Nm Rohs Compliant: Yes", Component Type=Standard, Design Item ID=CMP-004-00034-2, Pins=4, Source=rgled.SchLib
F1: library part CMP-07399-000013-1, "FUSE BOARD MOUNT 2A 63VDC 1206", Case Code (Imperial)=1206, Case Code (Metric)=3216, Max Operating Temperature=105°C, Min Operating Temperature=-20°C, Voltage Rating (DC)=63V, Approvals=UL, Case/Package=1206, Current Rating=2A, Fuse Type="Board Mount (Cartridge Style Excluded)", Mount="Surface Mount", Packaging="Cut Tape", RoHS Compliant=Yes, Series="SinglFuse™ SF-1206FP"
FB1 FB2 FB3 FB4 FB5 FB6 FB7 FB8 FB9 FB10 FB11_PHY_1 FB11_PHY_2 FB11_PHY_3 FB11_PHY_4 FB12_PHY_1 FB12_PHY_2 FB12_PHY_3 FB12_PHY_4 FB13_PHY_1 FB13_PHY_2 FB13_PHY_3 FB13_PHY_4 FB14_PHY_1 FB14_PHY_2 FB14_PHY_3 FB14_PHY_4 FB15_PHY_1 FB15_PHY_2 FB15_PHY_3 FB15_PHY_4 FB16_PHY_1 FB16_PHY_2 FB16_PHY_3 FB16_PHY_4 FB17_PHY_1 FB17_PHY_2 FB17_PHY_3 FB17_PHY_4 FB18 FB19 FB20 FB21 FB22 FB23: library part CMP-06046-002069-1, "Chip Ferrite Bead, 0603, 330Ω @ 100MHz, 0.08Ω, 25%, 1.7A", Case Code (Imperial)=0603, Case Code (Metric)=1608, DC Resistance (DCR)=80mR, Max Current Rating=1.7A, Max Operating Temperature=125°C, Min Operating Temperature=-55°C, Package Quantity=4000, Ratings=AEC-Q200, Case/Package=0603, Height=0.037inch, Length=0.063inch, Mount="Surface Mount", Number of Lines=1, Packaging="Tape and Reel", RoHS Compliant=Yes, Width=0.032inch
J1: library part CMP-002-00067-1, "Barrier Strip Terminal Block", RoHS Compliant=Yes
J2: library part CMP-12637-106234071-1, "PJ-102A 2.0 x 6.5 mm, 2.5 A, Horizontal, Through Hole, Tapered Pins, Dc Power Jack Connector", Color=Black, Current Rating=2.5A, Flammability Rating="UL94 V-0", Insulation Resistance=50MΩ, Max Operating Temperature=85°C, Min Operating Temperature=-25°C, Voltage Rating=24V, Contact Gender=Male, Contact Material="Copper, Nickel, Tin", Contact Plating=Nickel, Diameter=2.1mm, Gender=Male, Height=11.2mm, Housing Color=Black, Housing Material=Thermoplastic, Inside Diameter=2mm, Lead Free="Lead Free", Lifecycle Status=Production, Mount="Through Hole", NexarPartId=106234071, Number of Conductors=2, Number of Contacts=3, Orientation=Horizontal, Outside Diameter=6.5mm, Packaging=Bulk, RoHS=Compliant, Schedule B="8536695050, 8536695050", Shielding=No, Termination="Through Hole", Voltage Rating (DC)=24V
J3: library part CMP-002-00090-1, "Connector RJ45 Receptacle 8 Position Solder Straight Through Hole 1 Port Tray", Max Operating Temperature=70°C, Min Operating Temperature=0°C, Pins=8
J4 J5 J6 J7: library part CMP-002-00103-2, "RF Connector, 2 Contact(s), Male, Panel Mount, Board And Panel Mount, Solder Terminal, Plug", Max Operating Temperature=105°C, Min Operating Temperature=-40°C, Pins=2
J8 J9: library part CMP-001-0013-3, "CONN HEADER SMD 10POS 1.27MM"
J10 J11 J12 J13 J14 J15 J16 J17 J18 J19: library part CMP-2000-05181-2, "PC TEST POINT MINIATURE BLACK", Color=Black, Flammability Rating="UL94 V-0", Package Quantity=100, Body Material=Bronze, Contact Material=Bronze, Contact Plating=Silver, Diameter=2.54mm, Height=0.3inch, Hole Diameter=1.6mm, Housing Color=Black, Inside Diameter=1.27mm, Insulation=Insulated, Insulation Material=Nylon, Lead Free="Lead Free", Length=7.62mm, Material=Nylon, Mount="Through Hole", Number of Contacts=1, Number of Ports=1, Orientation=Straight, Outside Diameter=2.54mm, Packaging=Bulk, Plating=Silver, REACH SVHC="No SVHC", RoHS Compliant=Yes, Series=THM, Termination="Through Hole"
L1_PHY_1 L1_PHY_2 L1_PHY_3 L1_PHY_4: library part CMP-08256-000023-1, "CMC 80UH 70MA 2LN 3.8KOHM SMD"
L2: library part CMP-1353-00019-6, "Inductor Power Shielded/Molded Wirewound 2.2uH 20% 100KHz Powdered Iron 10A 0.008Ohm DCR T/R Automotive AEC-Q200", Ambient Temperature Range High=85°C, Ambient Temperature Range Low=-40°C, Case/Package=Nonstandard, Current Rating=10A, DC Resistance (DCR)=7.2mΩ, Frequency=22MHz, Inductance=2.2µH, Inductance Tolerance=20%, Max Operating Temperature=125°C, Saturation Current=14.2A, Series Resistance=8mΩ, Test Frequency=100kHz, Composition=Wirewound, Core Material="Composite, Ferrite", Depth=12.6mm, Height=3.3mm, Height - Seated (Max)=3.5052mm, Length=13.5mm, Max DC Current=10A, Min Operating Temperature=-40°C, Mount="Surface Mount", REACH SVHC=Unknown, RMS Current (Irms)=10A, RoHS=Compliant, Self Resonant Frequency=22MHz, Shielding=Shielded, Termination=SMD/SMT, Tolerance=20%, Width=12.6mm
MH1 MH2 MH3 MH4 MH5 MH6 MH7 MH8: library part CMP-00028-00001-13, "Plated mounting hole with 6 peripheral vias. This is a generic symbol that groups all relevant footprints."
Q1: library part CMP-013-00018-2, "Trans MOSFET P-CH 20V 22.1A 8-Pin PowerPAK 1212 EP T/R", Component Type=Standard, Design Item ID=CMP-013-00036-4, Pins=5, Source=SISH615ADN-T1-GE3.SchLib
R1 R2 R3 R4 R5 R6 R7 R8 R10 R11_PHY_1 R11_PHY_2 R11_PHY_3 R11_PHY_4 R12_PHY_1 R12_PHY_2 R12_PHY_3 R12_PHY_4 R13_PHY_1 R13_PHY_2 R13_PHY_3 R13_PHY_4 R14_PHY_1 R14_PHY_2 R14_PHY_3 R14_PHY_4 R15_PHY_1 R15_PHY_2 R15_PHY_3 R15_PHY_4 R16_PHY_1 R16_PHY_2 R16_PHY_3 R16_PHY_4 R17_PHY_1 R17_PHY_2 R17_PHY_3 R17_PHY_4 R18_PHY_1 R18_PHY_2 R18_PHY_3 R18_PHY_4 R19_PHY_1 R19_PHY_2 R19_PHY_3 R19_PHY_4 R20_PHY_1 R20_PHY_2 R20_PHY_3 R20_PHY_4 R21_PHY_1 R21_PHY_2 R21_PHY_3 R21_PHY_4 R22_PHY_1 R22_PHY_2 R22_PHY_3 R22_PHY_4 R23_PHY_1 R23_PHY_2 R23_PHY_3 R23_PHY_4 R24_PHY_1 R24_PHY_2 R24_PHY_3 R24_PHY_4 R25_PHY_1 R25_PHY_2 R25_PHY_3 R25_PHY_4 R26_PHY_1 R26_PHY_2 R26_PHY_3 R26_PHY_4 R27_PHY_1 R27_PHY_2 R27_PHY_3 R27_PHY_4 R28_PHY_1 R28_PHY_2 R28_PHY_3 R28_PHY_4 R29_PHY_1 R29_PHY_2 R29_PHY_3 R29_PHY_4 R30 R31 R32 R33 R34 R35 R36 R37 R39 R41 R42 R43 R44_REG_1 R44_REG_2 R44_REG_3 R45_REG_1 R45_REG_2 R45_REG_3 R46_REG_1 R46_REG_2 R46_REG_3 R47 R50 R51 R52 R53 R54: library part CMP-009-00002-14, "Resistor"
R38 R40 R48 R55 R56 R57 R58 R59 R60 R61 R62 R63 R64 R65 R66 R67 R68 R69 R70 R71 R72 R73 R74 R75 R76: library part CMP-009-00118-2, "READ THE NAME", Component Type=Standard, Design Item ID=CMP-009-00206-2, Pins=2, Source=0402jump.SchLib
SW1: library part CMP-10040-000029-1, "SWITCH TACTILE SPST-NO 0.02A 15V", Current Rating=5A, Flammability Rating="UL94 V-0", Insulation Color=Black, Max Operating Temperature=85°C, Min Operating Temperature=-40°C, Operating Force=240gf, Actuator Type=Standard, Connector Type=USB, Contact Plating=Gold, Gender=Receptacle, Illumination Type=Non-Illuminated, Mechanical Life=500000Cycles, Mount="Surface Mount", Number of Contacts=24, Number of Ports=1, Packaging="Tape and Reel", Switch Function=Off-Mom, Switch Travel=0.13mm, Termination=Solder, Throw Configuration=SPST
U1: library part CMP-015-00025-2, "Ethernet Controller, Ethernet Switch, IEEE 802.3, 1.2 V, LFBGA, 159 Pins", Max Operating Temperature=105°C, Min Operating Temperature=-40°C
U2_PHY_1 U2_PHY_2 U2_PHY_3 U2_PHY_4: library part CMP-015-00023-5, "100/1000BASE-T1 Rgmii/sgmii Phy", Case/Package=VQFN, Pins=48
U3: library part CMP-015-00022-5, "LAN8830 Series RGMII Interface Gigabit Ethernet Transceiver - VQFN-48", Case/Package=VQFN, Pins=48
U4_REG_1 U4_REG_2 U4_REG_3: library part CMP-0136-00358-1, "1A, Low Voltage, Low Quiescent Current LDO Regulator, 8-Pin DFN, Extended Temperature, Tape and Reel", DatasheetVersion="revC, Aug-2007", PackageDescription="8-Lead Plastic Dual Flat, No Lead Package (MF) - 3x3x0.9mm Body [DFN]", PackageReference=DFN-MF8, PackageVersion="revBB, Aug-2009"
U5: library part CMP-04918-000675-1, "10-A AUTOMOTIVE BUCK CONVERTER O"
U6: library part CMP-020-00020-2, "MCU 32-Bit STM32 ARM Cortex-M4 RISC 512KB Flash 1.71V to 3.6V 64-Pin LQFP T/R", RoHS Compliant=Yes
Y1 Y2_PHY_1 Y2_PHY_2 Y2_PHY_3 Y2_PHY_4 Y3 Y4: library part CMP-2000-05733-3, "Crystal 25MHz ±20ppm (Tol) ±30ppm (Stability) 18pF FUND 60Ω 4-Pin SMD T/R", Case/Package=CSMD, ESR (Equivalent Series Resistance)=60R, Frequency=25MHz, Frequency Stability=30ppm, Frequency Tolerance=20ppm, Load Capacitance=18pF, Max Operating Temperature=85°C, Min Operating Temperature=-40°C, Operating Frequency="25 MHz", Package Quantity=1000, Depth=2.5mm, Height=0.039inch, Lead Free="Lead Free", Length=3.2mm, Mount="Surface Mount", Number of Pins=4, Packaging="Tape and Reel", Radiation Hardening=No, Series=ABM8G, Series Resistance=60R, Termination=SMD/SMT, Tolerance=20ppm, Width=0.098inch
Y5: library part CMP-40224-000006-1, "CRYSTAL 32.7680KHZ 12.5PF SMD", Frequency=32.768kHz, Load Capacitance=12.5pF, Manufacturer="ECS International", Package=ECX-1210, Temperature="-40°C to +85°C", Temperature Range High=+85°C, Temperature Range Low=-40°C, Tolerance=20ppm, Automotive=No, Category=Crys, ComponentLink2Description=Datasheet, ComponentLink2URL=https://ecsxtal.com/store/pdf/ECX-1210.pdf, Device Class L1="Passive Components", Device Class L2="Crystals / Oscillators", Device Class L3=Crystals, Digikey Description="CRYSTAL 32.7680KHZ 12.5PF SMD", Esr=90kΩ, Height=0.5mm, Lead Free=Yes, Manufacturer Part Number=ECS-.327-12.5-1210-TR, Octopart=https://octopart.com/ecs-.327-12.5-1210-tr-ecs+international-81221340, RoHS=TRUE, Series=ECX-1210

## Via types
v1: diameter 0.5, hole 0.3, Top Layer to Bottom Layer, tented both sides, 469 vias
v2: diameter 0.4, hole 0.3, Top Layer to Bottom Layer, tented both sides, 44 vias
v3: diameter 0.66, hole 0.33, Top Layer to Bottom Layer, tented both sides, 6 vias

## Nets (pads, with @x,y where several pads share a name; then routed paths per layer and width w, separated by ;. In a path a pad name is that pad's centre, name@x,y a point inside that pad or via, vN(x,y) a via of type N, cw(c..) or ccw(c..) an arc to the next point about the centre after c; other vN are vias at no path point)
1V2: C117_REG_1.1 C118_REG_1.1 FB1.1 FB4.1 FB7.1 J14.1 R44_REG_1.2 U4_REG_1.8 | length 39.2
  Mid Layer 2 w0.5: J14.1@33,30 37,26 63.5,26 v1(68.5,31)
  other v1: 72,31 67.75,31.5 69.25,31.5 71.25,31.5 72.75,31.5
3V3: C115_REG_1.1 C115_REG_2.1 C115_REG_3.1 C116_REG_1.1 C116_REG_2.1 C116_REG_3.1 C121.1 C122.1 C123.1 C124.1 C129.2 C136.1 C137.1 C138.1 C139.1 C140.1 C143.1 C144.1 D8_PHY_1.2 D8_PHY_1.3 D8_PHY_2.2 D8_PHY_2.3 D8_PHY_3.2 D8_PHY_3.3 D8_PHY_4.2 D8_PHY_4.3 FB2.1 FB3.1 FB5.1 FB6.1 FB8.1 FB9.1 FB10.1 FB15_PHY_1.1 FB15_PHY_2.1 FB15_PHY_3.1 FB15_PHY_4.1 FB16_PHY_1.1 FB16_PHY_2.1 FB16_PHY_3.1 FB16_PHY_4.1 FB17_PHY_1.1 FB17_PHY_2.1 FB17_PHY_3.1 FB17_PHY_4.1 FB18.1 FB21.1 FB23.1 J3.L2 J3.L4 J8.1 J9.1 J12.1 L2.2 R4.1 R5.1 R6.1 R7.2 R8.1 R10.2 R45_REG_1.1 R45_REG_2.1 R45_REG_3.1 R50.2 R51.2 R52.2 R54.1 U4_REG_1.1 U4_REG_1.2 U4_REG_2.1 U4_REG_2.2 U4_REG_3.1 U4_REG_3.2 U5.5 U5.7 U6.1 U6.16 U6.32 U6.48 U6.64 | length 55.5
  Top Layer w0.2: R45_REG_1.1@60.85,28 60.85,28.075 61.5,28.725 61.5,31.25 ; R45_REG_2.1@80.85,28 81.5,28.65 81.5,32.191
  Top Layer w0.25: v1(17.75,41.5) 19.25,41.5 19.475,41.725 U5.5@19.475,42.538
  Top Layer w0.3: D8_PHY_1.3@8.2,97.55 D8_PHY_1.2@8.2,98.45 ; D8_PHY_2.3@38.2,97.55 D8_PHY_2.2@38.2,98.45 ; D8_PHY_3.3@68.2,97.55 D8_PHY_3.2@68.2,98.45 ; D8_PHY_4.3@98.2,97.55 D8_PHY_4.2@98.2,98.45
  Bottom Layer w0.2: v1(27.5,55) R45_REG_3.1@28.35,55
  Bottom Layer w0.3: v1(17.75,41.5) 17.75,42.5 20,44.75 40.75,44.75 v1(42.25,43.25) ; R4.1@79.65,38 R5.1@79.65,39.5 ; R8.1@79.65,44 R6.1@79.65,41 R5.1@79.65,39.5 ; v1(80.73,38.46) 80.015,39.175 79.9,39.175 79.65,39.425 R5.1@79.65,39.5 ; v1(113.25,53.75) 113.288,53.788 113.888,53.788 114.025,53.925 114.1,53.925 114.35,54.175 R50.2@114.35,54.25 R51.2@114.35,55.75
  Bottom Layer w0.5: v1(53.75,56.75) 54.25,56.75 FB8.1@56,55
  other v1: 99,9.5 60,31.5 78,31.5 59.5,32 60.5,32 77.5,32 78.5,32 93.25,37.25 100.75,37.25 107,38 116.73,38.46 42.25,38.75 43.75,38.75 43,39.5 98.5,40 88,41.25 43,42.5 43.75,43.25 93.25,44.75 99.25,44.75 100.75,44.75 72.75,45.5 54.5,46.75 53.75,47.25 72.75,49 112,49 27,54.5 26.5,55 70.25,56.5 9.5,84 39.5,84 69.5,84 99.5,84 9.5,85 39.5,85 69.5,85 99.5,85 9.5,86 39.5,86 69.5,86 99.5,86 9.5,87 39.5,87 69.5,87 99.5,87 9.5,88 39.5,88 69.5,88 99.5,88 9.5,89 39.5,89 69.5,89 99.5,89 7.75,98.75 37.75,98.75 67.75,98.75 97.75,98.75
3V3_LAN8830_nRST: C93.1 R30.2 U3.43 | length 3.6
  Top Layer w0.2: R30.2@96.15,23 96.25,23.1 v1(96.25,24)
  Bottom Layer w0.2: U3.43@96.25,21.4 v1(96.25,24)
3V3_LAN8870_0_nRST: C67_PHY_1.1 R14_PHY_1.2 U2_PHY_1.39 | length 6.7
  Bottom Layer w0.2: R14_PHY_1.2@13.5,87.5 13.65,87.35 14.829,87.35 C67_PHY_1.1@15,87.521 15,86.25 17.25,84 U2_PHY_1.39@17.25,83.4
3V3_LAN8870_1_nRST: C67_PHY_2.1 R14_PHY_2.2 U2_PHY_2.39 | length 6.7
  Bottom Layer w0.2: R14_PHY_2.2@43.5,87.5 43.65,87.35 44.829,87.35 C67_PHY_2.1@45,87.521 45,86.25 47.25,84 U2_PHY_2.39@47.25,83.4
3V3_LAN8870_2_nRST: C67_PHY_3.1 R14_PHY_3.2 U2_PHY_3.39 | length 6.7
  Bottom Layer w0.2: R14_PHY_3.2@73.5,87.5 73.65,87.35 74.829,87.35 C67_PHY_3.1@75,87.521 75,86.25 77.25,84 U2_PHY_3.39@77.25,83.4
3V3_LAN8870_3_nRST: C67_PHY_4.1 R14_PHY_4.2 U2_PHY_4.39 | length 6.7
  Bottom Layer w0.2: R14_PHY_4.2@103.5,87.5 103.65,87.35 104.829,87.35 C67_PHY_4.1@105,87.521 105,86.25 107.25,84 U2_PHY_4.39@107.25,83.4
3V3_SJA1150Q_JTAG_nRST: J8.10 R8.2 U1.M1 | length 12.3
  Top Layer w0.2: U1.M1@67.6,44.8 69.5,42.9 74.35,42.9 v1(74.75,42.5)
  Bottom Layer w0.2: v1(74.75,42.5) 76.23,42.5 77.73,44 R8.2@78.35,44
  other v1: 77.27,43.54
3V3_SJA1150Q_JTAG_TCK: J8.4 R5.2 U1.N1 | length 13.8
  Top Layer w0.2: U1.N1@68.4,44.8 68.438,44.762 68.438,44.403 69.641,43.2 74.9,43.2 75.6,42.5 75.6,40 75.87,39.73 v1(77.27,39.73)
  Bottom Layer w0.2: v1(77.27,39.73) 78.12,39.73 R5.2@78.35,39.5
3V3_SJA1150Q_JTAG_TDI: J8.8 R7.1 U1.M2 | length 12.6
  Top Layer w0.2: U1.M2@67.6,45.6 68,45.2 68.683,45.2 68.8,45.083 68.8,44.45 69.75,43.5 75.009,43.5 76.052,42.456 77.084,42.456 v1(77.27,42.27)
  Bottom Layer w0.2: v1(77.27,42.27) 78.12,42.27 R7.1@78.35,42.5
3V3_SJA1150Q_JTAG_TDO: J8.6 R6.2 U1.N3 | length 16.6
  Top Layer w0.2: U1.N3@68.4,46.4 68.811,45.989 69.511,45.989 71.4,44.1 78.4,44.1 79,43.5 79,41.955 78.045,41 v1(77.27,41)
  Bottom Layer w0.2: v1(77.27,41) R6.2@78.35,41
3V3_SJA1150Q_JTAG_TMS: J8.2 R4.2 U1.P2 | length 22.5
  Top Layer w0.2: U1.P2@69.2,45.6 70.989,43.811 75.189,43.811 76.1,42.9 78.4,42.9 78.6,42.7 78.6,42.003 78.197,41.6 76.084,41.6 75.9,41.416 75.9,40.6 76.1,40.4 78.35,40.4 78.96,39.79 78.96,38.96 78.646,38.646 77.456,38.646 v1(77.27,38.46)
  Bottom Layer w0.2: v1(77.27,38.46) 77.73,38 R4.2@78.35,38
3V3_SJA1150Q_MISO: J13.1 U1.P4 U6.20 | length 48
  Top Layer w0.2: U1.P4@69.2,47.2 85.8,47.2 v1(89.75,43.25) U6.20@91.25,43.25
  Bottom Layer w0.2: v1(89.75,43.25) 90.539,44.039 90.539,45.039 102.422,56.922 103.672,56.922 105.75,59 J13.1@107,59
3V3_SJA1150Q_MOSI: J11.1 U1.N5 U6.21 | length 46.9
  Top Layer w0.2: U1.N5@68.4,48 68.789,47.611 68.789,47.061 69.061,46.789 85.461,46.789 v1(89,43.25) 89.5,42.75 U6.21@91.25,42.75
  Bottom Layer w0.2: v1(89,43.25) 89,45 J11.1@103,59
3V3_SJA1150Q_nCS: J17.1 U1.N6 U6.18 | length 57.6
  Top Layer w0.2: U1.N6@68.4,48.8 68.789,48.411 86.089,48.411 90.25,44.25 U6.18@91.25,44.25
  Bottom Layer w0.2: v1(89.75,44.75) 89.75,45.25 102,57.5 103.25,57.5 106.25,60.5 113.5,60.5 114.75,59.25 J17.1@115.25,59.25
3V3_SJA1150Q_nRST: R10.1 U1.P3 U6.22 | length 23.8
  Top Layer w0.2: U1.P3@69.2,46.4 85.1,46.4 89.25,42.25 U6.22@91.25,42.25
3V3_SJA1150Q_SCLK: J15.1 U1.P5 U6.19 | length 52.7
  Top Layer w0.2: U1.P5@69.2,48 85.75,48 v1(89.75,44) 90,43.75 U6.19@91.25,43.75
  Bottom Layer w0.2: v1(89.75,44) 90.25,44.5 90.25,45.25 102.211,57.211 103.461,57.211 106.461,60.211 109.789,60.211 J15.1@111,59
8830_1V1: C117_REG_2.1 C118_REG_2.1 FB19.1 FB20.1 FB22.1 J16.1 R44_REG_2.2 U4_REG_2.8 | length 30.6
  Mid Layer 2 w0.5: v1(88.5,31.5) 92,28 92,16 96,12 J16.1@96,4
8870_1V1: C117_REG_3.1 C118_REG_3.1 FB12_PHY_1.1 FB12_PHY_2.1 FB12_PHY_3.1 FB12_PHY_4.1 FB13_PHY_1.1 FB13_PHY_2.1 FB13_PHY_3.1 FB13_PHY_4.1 FB14_PHY_1.2 FB14_PHY_2.2 FB14_PHY_3.2 FB14_PHY_4.2 J18.1 R44_REG_3.2 U4_REG_3.8
  other v1: 38,54 41,54 37.5,54.5 38.5,54.5 40.5,54.5 41.5,54.5 44.5,69.25 13,71.75 73,71.75 103,71.75 27.5,77.25 28.25,77.25 29,77.25 57.5,77.25 58.25,77.25 59,77.25 87.5,77.25 88.25,77.25 89,77.25 117.5,77.25 118.25,77.25 119,77.25